# Altium PCB Refl.Sens v1.0.PcbDoc
Units mm, origin at the board's own origin, x right, y up, seen from the top; angles counter-clockwise.
Board outline 66.04 x 16.51 mm, 2 copper layers (Top Layer, Bottom Layer); 24 components, 23 nets, 103 pads, 21 vias.
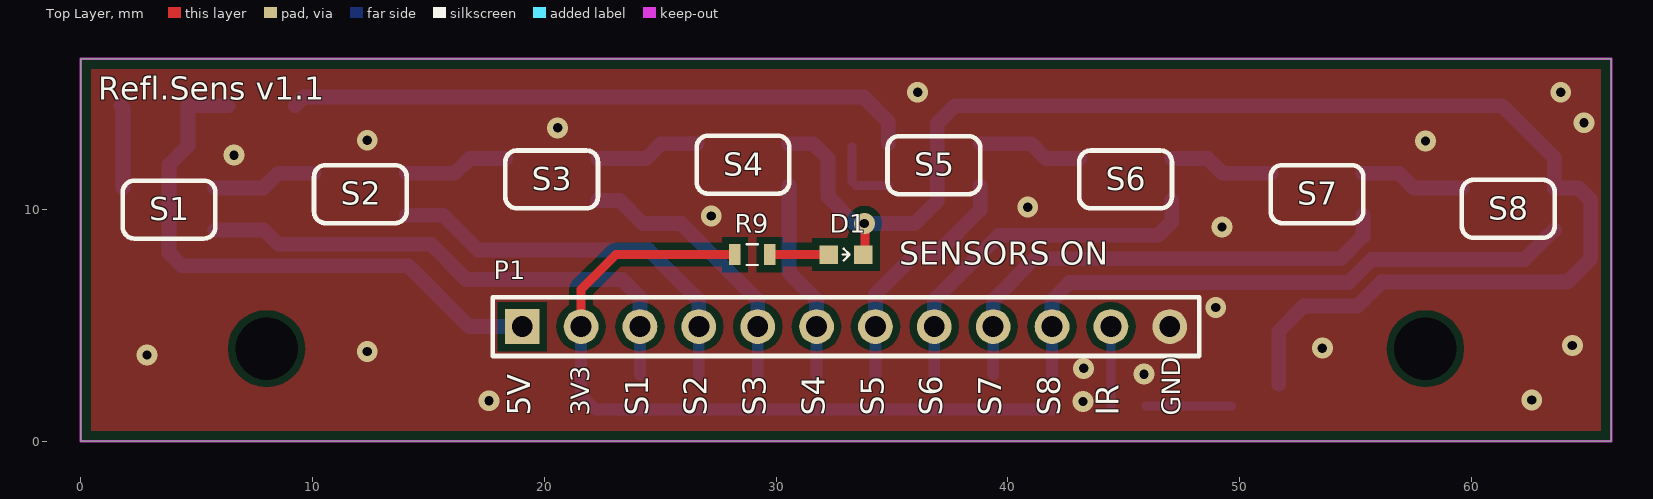
[diagram p0: Top Layer view]
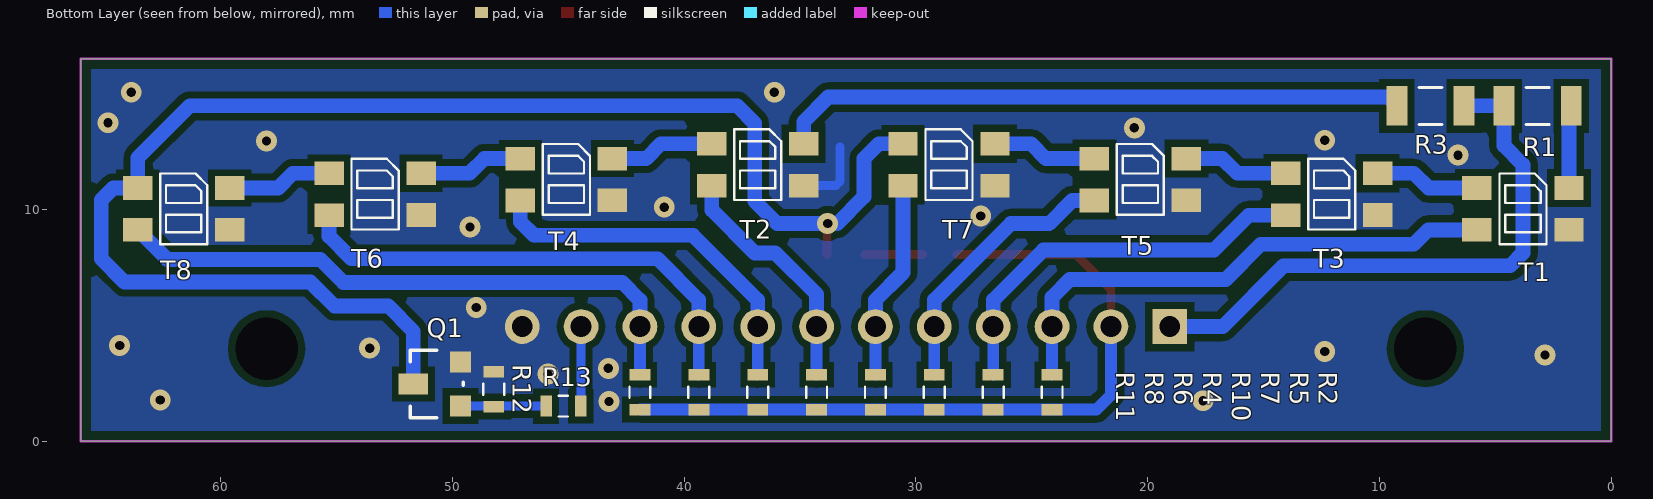
[diagram p1: Bottom Layer view, seen from below]

## Layer stack, top to bottom
Top Solder: solder mask 0.0102, Solder Resist, Dk 3.5
Top Layer: signal copper 0.0356
Dielectric 1: dielectric 0.32, FR-4, Dk 4.8
Bottom Layer: signal copper 0.0356
Bottom Solder: solder mask 0.0102, Solder Resist, Dk 3.5

## Board outline
0,0 66.04,0 66.04,16.51 0,16.51

## Design rules (kind name [scope] priority, off if disabled: settings)
Clearance STM32 [InComponent('U1')] p1: gap=0.178 ignorepadtopadclearanceinfootprint=FALSE except(0: Arc-Hole Track-Hole SMDPad-Hole THPad-Hole Via-Hole Fill-Hole Poly-Hole Region-Hole Text-Hole)
Clearance Krawedzie [OnLayer('Keep-Out Layer')] p2: gap=0.4 ignorepadtopadclearanceinfootprint=FALSE
Clearance Polygon [inPolygon] p3: gap=0.305 ignorepadtopadclearanceinfootprint=FALSE
Clearance +U_LED_TAP1 [InNet('+U_P') vs InNet('NetD101_2')   OR InNet('NetD119_2')] p4: gap=0.025 ignorepadtopadclearanceinfootprint=FALSE except(0: Arc-Hole Track-Hole SMDPad-Hole THPad-Hole Via-Hole Fill-Hole Poly-Hole Region-Hole Text-Hole)
Clearance +U_All [InNet('+U_P')] p5: gap=1.2 ignorepadtopadclearanceinfootprint=FALSE except(0: Arc-Hole Track-Hole SMDPad-Hole THPad-Hole Via-Hole Fill-Hole Poly-Hole Region-Hole Text-Hole)
Clearance All [All] p6: gap=0.178 ignorepadtopadclearanceinfootprint=FALSE except(0.152: Arc-SMDPad Track-SMDPad SMDPad-SMDPad)
ComponentClearance [All] p1: gap=0.025 collisioncheckmode=3 verticalgap=0.025 showdistances=FALSE
Height [All] p1: minheight=0 maxheight=60 prefheight=12.7
HoleSize [All] p1: absolutevalues=TRUE maxlimit=4 minlimit=0.4 maxpercent=80.000 minpercent=20.000
MinimumSolderMaskSliver [All] p1: minsoldermaskwidth=0
PolygonConnect [All] p1: connectstyle=Direct reliefconductorwidth=0.254 reliefentries=4 polygonreliefangle="90 Angle" airgapwidth=0.254
RoutingVias [All] p1: holewidth=0.711 width=1.27 viastyle="Through Hole" minholewidth=0.4 minwidth=0.8 maxholewidth=0.711 maxwidth=1.27
SilkToSilkClearance [All] p1: silktosilkclearance=0.1
SilkToSolderMaskClearance [IsPad] p1: minsilkscreentomaskgap=0.003 clearancetoexposedcopper=TRUE
SolderMaskExpansion [All] p1: expansion=0.102
Width [All] p1: maxlimit=5.08 minlimit=0.178 preferedwidth=0.254 bottomlayer_minwidth=0.203 minimp=50.000000 maximp=50.000000 favimp=50.000000
24 further rules are at their usual default settings.

## Classes and differential pairs
net class CONA[1..8]: CONA1 CONA2 CONA3 CONA4 CONA5 CONA6 CONA7 CONA8

## Components (designator, comment, footprint, x,y, rotation, side; value= is the part's Value field where it differs from the comment)
D1 "Green led" OL_0603_1608 33.02,8.06 r180 top value=OSG80603C1E
P1 "Header 12 Male" H1X12_LONG 19.05,4.953 r0 top
Q1 "BSS138LT1G" SOT23_TO236_SC59 50.673,2.476 r90 bottom
R1 "Resistor" R_1206 3.175,14.478 r0 bottom value=10R
R2 "Resistor" R_0603#1 24.13,2.121 r270 bottom value=10k
R3 "Resistor" R_1206 7.8,14.478 r180 bottom value=10R
R4 "Resistor" R_0603#1 34.29,2.121 r270 bottom value=10k
R5 "Resistor" R_0603#1 26.67,2.121 r270 bottom value=10k
R6 "Resistor" R_0603#1 36.83,2.121 r270 bottom value=10k
R7 "Resistor" R_0603#1 29.21,2.121 r270 bottom value=10k
R8 "Resistor" R_0603#1 39.37,2.121 r270 bottom value=10k
R9 "Resistor" R_0603#2 28.976,8.06 r180 top value=330R
R10 "Resistor" R_0603#1 31.75,2.121 r270 bottom value=10k
R11 "Resistor" R_0603#1 41.91,2.121 r270 bottom value=10k
R12 "Resistor" R_0603#1 48.219,2.25 r270 bottom value=100k
R13 "Resistor" R_0603#1 45.212,1.524 r180 bottom value=100R
T1 "KTIR0711S" KTIR0711S 3.81,10.033 r0 bottom
T2 "KTIR0711S" KTIR0711S 36.83,11.938 r0 bottom
T3 "KTIR0711S" KTIR0711S 12.065,10.668 r0 bottom
T4 "KTIR0711S" KTIR0711S 45.085,11.303 r0 bottom
T5 "KTIR0711S" KTIR0711S 20.32,11.303 r0 bottom
T6 "KTIR0711S" KTIR0711S 53.34,10.668 r0 bottom
T7 "KTIR0711S" KTIR0711S 28.575,11.938 r0 bottom
T8 "KTIR0711S" KTIR0711S 61.595,10.033 r0 bottom

## Footprints (in the part's own frame and the unit in brackets; to place one, negate y for a bottom-side part, rotate by r counter-clockwise, add the part's x,y. Pads: shape width x height; smd on the part's side, far side on the other; paste and mask are expansions set on the pad)
H1X12_LONG [mm]
  rect 1.5x1.5 hole 0.9: 1(0,0)
  round 1.5 hole 0.9: 2(2.54,0) 3(5.08,0) 4(7.62,0) 5(10.16,0) 6(12.7,0) 7(15.24,0) 8(17.78,0) 9(20.32,0) 10(22.86,0) 11(25.4,0) 12(27.94,0)
  silkscreen extent -1.27,-1.27 29.21,1.27, body extent -1.27,-1.27 29.21,1.22, height 26
KTIR0711S [mm]
  rect 1.27x1.016 smd: 1(-1.985,-0.9) 2(-1.985,0.9) 3(1.985,0.91) 4(1.985,-0.9)
  silkscreen extent -1.02,-1.52 1.02,1.52, body extent -2.25,-1.7 2.25,1.7, height 1.5
OL_0603_1608 [mm]
  rect 0.8x0.8 smd: 1(-0.75,0) 2(0.75,0)
  silkscreen extent -0.15,-0.25 0.15,0.25, body extent -0.8,-0.4 0.8,0.4, height 0.75
R_0603#1 [mm]
  rect 0.5x0.9 smd paste-10: 1(-0.75,0) 2(0.75,0)
  rrect40% 0.5x0.9 on Bottom Paste paste-10: 1(-0.75,0) 2(0.75,0)
  silkscreen extent -0.25,-0.45 0.25,0.45, body extent -0.8,-0.45 0.8,0.45, height 0.5
R_0603#2 [mm]
  rect 0.5x0.9 smd paste-10: 1(-0.75,0) 2(0.75,0)
  rrect40% 0.5x0.9 on Top Paste paste-10: 1(-0.75,0) 2(0.75,0)
  silkscreen extent -0.25,-0.45 0.25,0.45, body extent -0.8,-0.45 0.8,0.45, height 0.5
R_1206 [mm]
  rect 0.9x1.7 smd paste-10: 1(-1.45,0) 2(1.45,0)
  rrect40% 0.9x1.7 on Bottom Paste paste-10: 1(-1.45,0) 2(1.45,0)
  silkscreen extent -0.5,-0.8 0.5,0.8, body extent -1.6,-0.8 1.6,0.8, height 0.6
SOT23_TO236_SC59 [mil]
  rect 36x36 smd: 1(-37.5,-40) 2(37.5,-40)
  rect 36x50 smd: 3(0,40)
  silkscreen extent -57,-45 58,45, body extent -57,-55 57,55, height 51

## Part data
D1: library part OL_G_0603_OSG80603C1E, "LED GREEN", Manufacturer=Optosupply, Manufacturer Part Number=OSG80603C1E, Part Number=OL_G_0603_OSG80603C1E, SCH_Footprint=0603, Supplier 1=TME, Supplier 2="RS Components", Supplier 3=Farnell, Supplier 4=Mouser, Supplier 5=Digi-Key, Supplier Part Number 1=OSG80603C1E
P1: library part "Header 12", "Header, 12-Pin", LatestRevisionDate=17-Jul-2002, LatestRevisionNote="Re-released for DXP Platform.", System=Connector
Q1: library part QNS_BSS138LT1G_50V_0A2, Current=0A2, Manufacturer="ON Semiconductor", voltage=50V, HelpURL=https://datasheet.octopart.com/BSS138LT1G-ON-Semiconductor-datasheet-8332669.pdf, Manufacturer Part Number=BSS138LT1G, Part Number=QNS_BSS138LT1G_50V_0A2, SCH_Footprint=SOT23, Supplier 1=TME, Supplier 2="RS Components", Supplier 3=Farnell, Supplier 4=Mouser, Supplier 5=Digi-Key, Supplier Part Number 3=1752037, Supplier Part Number 4=511-STD3NK80Z, Supplier Part Number 5=497-7968-1-ND, Type=N-MOS
R1 R3: library part R_10R_1206_1, Manufacturer=Yageo, Manufacturer Part Number=RC1206FR-0710RL, Power=250mW, Tolerance=1%, voltage=200V, HelpURL=http://www.farnell.com/datasheets/444357.pdf, Part Number=R_10R_1206_1, SCH_Footprint=1206, Supplier 1=TME, Supplier 2="RS Components", Supplier 3=Farnell, Supplier 4=Mouser, Supplier 5=Digi-Key, Supplier Part Number 3=9236643, Supplier Part Number 4=603-RC1206FR-0710RL, Supplier Part Number 5=311-10.0FRCT-ND
R2 R4 R5 R6 R7 R8 R10 R11: library part R_10k_0603_1, Manufacturer=Vishay, Manufacturer Part Number=CRCW060310K0FKTABC, Power=100mW, Tolerance=1%, voltage=75V, HelpURL=http://www.tme.eu/pl/Document/622e28308c06d160637f2b14751ba16b/Data%20Sheet%20CRCW_BCe3.pdf, Part Number=R_10k_0603_1, SCH_Footprint=0603, Supplier 1=TME, Supplier 2="RS Components", Supplier 3=Farnell, Supplier 4=Mouser, Supplier 5=Digi-Key, Supplier Part Number 1=CRCW060310K0FKTABC, Supplier Part Number 4=667-ERJ-3EKF1002V, Supplier Part Number 5=P10KGCT-ND
R9: library part R_330R_0603_1, Manufacturer=Yageo, Manufacturer Part Number=RC0603FR-07330RL, Power=100mW, Supplier Part Number 1=RC0603FR-07330R, Tolerance=1%, voltage=50V, HelpURL=http://datasheet.octopart.com/RC0603FR-07330RL-Yageo-datasheet-8328172.pdf, Part Number=R_330R_0603_1, SCH_Footprint=0603, Supplier 1=TME, Supplier 2="RS Components", Supplier 3=Farnell, Supplier 4=Mouser, Supplier 5=Digi-Key, Supplier Part Number 2=5046499, Supplier Part Number 3=9238425, Supplier Part Number 4=603-RC0603FR-07330RL, Supplier Part Number 5=311-330HRCT-ND
R12: library part R_100k_0603_1, Manufacturer=Royalohm, Manufacturer Part Number=0603SAF1003T5E, Power=100mW, Supplier Part Number 1=SMD0603-100K-1%, Tolerance=1%, voltage=50V, HelpURL=http://www.tme.eu/pl/Document/b315665a56acbc42df513c99b390ad98/ROYALOHM-THICKFILM.pdf, Part Number=R_100k_0603_1, SCH_Footprint=0603, Supplier 1=TME, Supplier 2="RS Components", Supplier 3=Farnell, Supplier 4=Mouser, Supplier 5=Digi-Key, Supplier Part Number 4=667-ERJ-3EKF1003V, Supplier Part Number 5=P100KHCT-ND
R13: library part R_100R_0603_1, Manufacturer=Yageo, Manufacturer Part Number=RC0603FR-07100RL, Power=100mW, Supplier Part Number 1=RC0603FR-07100R, Tolerance=1%, voltage=50V, HelpURL=http://www.tme.eu/en/Document/d2a72e545e5c8eb7bf2a04fa97535928/rc0603yageo.pdf, Part Number=R_100R_0603_1, SCH_Footprint=0603, Supplier 1=TME, Supplier 2="RS Components", Supplier 3=Farnell, Supplier 4=Mouser, Supplier 5=Digi-Key, Supplier Part Number 3=2131804, Supplier Part Number 4=603-RC0603FR-07100RL, Supplier Part Number 5=311-100HRCT-ND

## Free pads (board coordinates)
  round 0 hole 2.7 unplated: 2(8.019,4) 2(58.021,4)

## Via types
v1: diameter 0.9, hole 0.4, Top Layer to Bottom Layer, tented both sides, 21 vias

## Nets (pads, with @x,y where several pads share a name; then routed paths per layer and width w, separated by ;. In a path a pad name is that pad's centre, name@x,y a point inside that pad or via, vN(x,y) a via of type N, cw(c..) or ccw(c..) an arc to the next point about the centre after c; other vN are vias at no path point)
+3V3: P1.2 R2.2@24.13,1.371 R4.2@34.29,1.371 R5.2@26.67,1.371 R6.2@36.83,1.371 R7.2@29.21,1.371 R8.2@39.37,1.371 R9.2@28.226,8.06 R10.2@31.75,1.371 R11.2@41.91,1.371 | length 32.4
  Top Layer w0.381: P1.2 21.59,6.563 23.087,8.06 R9.2@28.226,8.06
  Bottom Layer w0.508: P1.2 21.59,1.994 22.213,1.371 24.13,1.371 26.67,1.371 29.21,1.371 31.75,1.371 34.29,1.371 36.83,1.371 39.37,1.371 R11.2@41.91,1.371
+5V: P1.1 R1.2@4.625,14.478 R3.2@6.35,14.478 | length 25
  Bottom Layer w0.635: R3.2@6.35,14.478 4.625,14.478 4.625,12.753 3.81,11.938 3.81,8.128 4.363,7.575 14.142,7.575 16.764,4.953 P1.1
GND: P1.12 Q1.2 R12.1@48.219,3 T1.2 T2.2 T3.2 T4.2 T5.2 T6.2 T7.2 T8.2 | length 3.1
  Bottom Layer w0.381: 33.274,12.7 33.274,11.221 33.457,11.038 T2.2
  other v1: 43.25,1.725 17.612,1.75 62.612,1.785 45.875,2.9 43.275,3.15 2.862,3.73 12.362,3.879 53.575,4.021 64.362,4.133 48.975,5.775 49.245,9.25 27.208,9.727 40.862,10.105 6.612,12.35 58.021,12.965 12.362,12.994 20.577,13.527 64.862,13.75 36.112,15.061 63.862,15.061
NetD1_1: D1.1 Q1.3 T7.4 T8.4 | length 64
  Top Layer w0.381: v1(33.812,9.4) 33.833,9.379 D1.1@33.833,8.06
  Bottom Layer w0.635: T7.4 31.612,12.838 32.247,12.203 32.247,10.552 v1@33.401,9.398 ; v1@33.812,9.398 35.988,9.398 36.957,10.367 36.957,13.716 37.719,14.478 61.341,14.478 63.58,12.239 T8.4 64.632,10.933 65.151,10.414 65.151,7.874 64.152,6.875 56.125,6.875 55.092,5.842 52.775,5.842 51.689,4.756 Q1.3
NetD1_2: D1.2 R9.1@29.726,8.06 | length 2.5
  Top Layer w0.381: R9.1@29.726,8.06 D1.2@32.207,8.06
NetP1_11: P1.11 R13.2@44.462,1.524 | length 3.4
  Bottom Layer w0.381: P1.11 44.45,1.536 R13.2@44.462,1.524
NetQ1_1: Q1.1 R12.2@48.219,1.5 R13.1@45.962,1.524 | length 3.7
  Bottom Layer w0.381: R13.1@45.962,1.524 Q1.1
NetR1_1: R1.1@1.725,14.478 T1.1 | length 3.6
  Bottom Layer w0.635: R1.1@1.725,14.478 1.825,14.378 T1.1
NetR3_1: R3.1@9.25,14.478 T2.1 | length 27.2
  Bottom Layer w0.635: R3.1@9.25,14.478 9.631,14.859 33.782,14.859 34.845,13.796 T2.1
NetT1_4: T1.4 T3.1 | length 4.5
  Bottom Layer w0.635: T1.4 7.885,10.933 8.52,11.568 T3.1
NetT2_4: T2.4 T4.1 | length 4.5
  Bottom Layer w0.635: T2.4 41.01,12.838 41.645,12.203 T4.1
NetT3_4: T3.4 T5.1 | length 4.5
  Bottom Layer w0.635: T3.4 16.14,11.568 16.775,12.203 T5.1
NetT4_4: T4.4 T6.1 | length 4.5
  Bottom Layer w0.635: T4.4 48.63,12.203 49.265,11.568 T6.1
NetT5_4: T5.4 T7.1 | length 4.5
  Bottom Layer w0.635: T5.4 24.395,12.203 25.03,12.838 T7.1
NetT6_4: T6.4 T8.1 | length 4.5
  Bottom Layer w0.635: T6.4 56.885,11.568 57.52,10.933 T8.1
SENS1: P1.3 R2.1@24.13,2.871 T1.3 | length 22.9
  Bottom Layer w0.508: R2.1@24.13,2.871 P1.3
  Bottom Layer w0.635: T1.3 7.895,9.123 8.518,8.5 15.122,8.5 16.637,6.985 23.368,6.985 24.13,6.223 P1.3
SENS2: P1.4 R5.1@26.67,2.871 T3.3 | length 17.4
  Bottom Layer w0.508: R5.1@26.67,2.871 P1.4
  Bottom Layer w0.635: T3.3 15.642,9.758 17.145,8.255 24.511,8.255 26.67,6.096 P1.4
SENS3: P1.5 R7.1@29.21,2.871 T5.3 | length 11.9
  Bottom Layer w0.508: R7.1@29.21,2.871 P1.5
  Bottom Layer w0.635: T5.3 23.262,10.393 24.257,9.398 25.908,9.398 29.21,6.096 P1.5
SENS4: P1.6 R10.1@31.75,2.871 T7.3 | length 8.6
  Bottom Layer w0.508: R10.1@31.75,2.871 P1.6
  Bottom Layer w0.635: T7.3 30.56,7.286 31.75,6.096 P1.6
SENS5: P1.7 R4.1@34.29,2.871 T2.3 | length 10.6
  Bottom Layer w0.508: R4.1@34.29,2.871 P1.7
  Bottom Layer w0.635: P1.7 34.29,6.35 36.068,8.128 36.957,8.128 38.815,9.986 T2.3
SENS6: P1.8 R6.1@36.83,2.871 T4.3 | length 15.8
  Bottom Layer w0.508: R6.1@36.83,2.871 P1.8
  Bottom Layer w0.635: P1.8 36.83,6.096 39.624,8.89 46.482,8.89 47.07,9.478 T4.3
SENS7: P1.9 R8.1@39.37,2.871 T6.3 | length 21.2
  Bottom Layer w0.508: R8.1@39.37,2.871 P1.9
  Bottom Layer w0.635: P1.9 39.37,6.096 41.148,7.874 54.356,7.874 55.325,8.843 T6.3
SENS8: P1.10 R11.1@41.91,2.871 T8.3 | length 26.1
  Bottom Layer w0.508: R11.1@41.91,2.871 P1.10
  Bottom Layer w0.635: P1.10 41.91,6.096 42.672,6.858 54.714,6.858 55.706,7.85 62.307,7.85 T8.3
pads on no net: R1.1@1.725,14.478 R1.2@4.625,14.478 R2.1@24.13,2.871 R2.2@24.13,1.371 R3.1@9.25,14.478 R3.2@6.35,14.478 R4.1@34.29,2.871 R4.2@34.29,1.371 R5.1@26.67,2.871 R5.2@26.67,1.371 R6.1@36.83,2.871 R6.2@36.83,1.371 R7.1@29.21,2.871 R7.2@29.21,1.371 R8.1@39.37,2.871 R8.2@39.37,1.371 R9.1@29.726,8.06 R9.2@28.226,8.06 R10.1@31.75,2.871 R10.2@31.75,1.371 R11.1@41.91,2.871 R11.2@41.91,1.371 R12.1@48.219,3 R12.2@48.219,1.5 R13.1@45.962,1.524 R13.2@44.462,1.524

## Polygon pours and split planes (outlines as drawn)
GND on Top Layer "Bottom Layer-No Net" (solid, remove dead copper, pour order 4): 66.04,0 0,0 0,16.51 66.04,16.51
GND on Bottom Layer "Bottom Layer-No Net" (solid, remove dead copper, pour order 2): 66.04,0 0,0 0,16.51 66.04,16.51

## Keep-outs
Keep-Out Layer:
  the board outline again, w0.1

## Silkscreen, mask and mechanical layers (free items; w line width, h text height)
Top Overlay:
  lines w0.127: 3.812,11.25 ccw(c3.812,11.25) 3.812,11.25 ; 12.065,11.918 ccw(c12.065,11.918) 12.065,11.918 ; 20.32,12.553 ccw(c20.32,12.553) 20.32,12.553 ; 28.575,13.188 ccw(c28.575,13.188) 28.575,13.188 ; 36.812,13.168 ccw(c36.812,13.168) 36.812,13.168 ; 45.085,12.553 ccw(c45.085,12.553) 45.085,12.553 ; 53.34,11.918 ccw(c53.34,11.918) 53.34,11.918 ; 61.595,11.283 ccw(c61.595,11.283) 61.595,11.283
  lines w0.2: 1.812,9.25 ccw(c2.312,9.25) 2.312,8.75 5.312,8.75 ccw(c5.312,9.25) 5.812,9.25 5.812,10.75 ccw(c5.312,10.75) 5.312,11.25 2.312,11.25 ccw(c2.312,10.75) 1.812,10.75 1.812,9.25 ; 10.065,9.918 ccw(c10.565,9.918) 10.565,9.418 13.565,9.418 ccw(c13.565,9.918) 14.065,9.918 14.065,11.418 ccw(c13.565,11.418) 13.565,11.918 10.565,11.918 ccw(c10.565,11.418) 10.065,11.418 10.065,9.918 ; 18.32,10.553 ccw(c18.82,10.553) 18.82,10.053 21.82,10.053 ccw(c21.82,10.553) 22.32,10.553 22.32,12.053 ccw(c21.82,12.053) 21.82,12.553 18.82,12.553 ccw(c18.82,12.053) 18.32,12.053 18.32,10.553 ; 26.575,11.188 ccw(c27.075,11.188) 27.075,10.688 30.075,10.688 ccw(c30.075,11.188) 30.575,11.188 30.575,12.688 ccw(c30.075,12.688) 30.075,13.188 27.075,13.188 ccw(c27.075,12.688) 26.575,12.688 26.575,11.188 ; 34.812,11.168 ccw(c35.312,11.168) 35.312,10.668 38.312,10.668 ccw(c38.312,11.168) 38.812,11.168 38.812,12.668 ccw(c38.312,12.668) 38.312,13.168 35.312,13.168 ccw(c35.312,12.668) 34.812,12.668 34.812,11.168 ; 43.085,10.553 ccw(c43.585,10.553) 43.585,10.053 46.585,10.053 ccw(c46.585,10.553) 47.085,10.553 47.085,12.053 ccw(c46.585,12.053) 46.585,12.553 43.585,12.553 ccw(c43.585,12.053) 43.085,12.053 43.085,10.553 ; 51.34,9.918 ccw(c51.84,9.918) 51.84,9.418 54.84,9.418 ccw(c54.84,9.918) 55.34,9.918 55.34,11.418 ccw(c54.84,11.418) 54.84,11.918 51.84,11.918 ccw(c51.84,11.418) 51.34,11.418 51.34,9.918 ; 59.595,9.283 ccw(c60.095,9.283) 60.095,8.783 63.095,8.783 ccw(c63.095,9.283) 63.595,9.283 63.595,10.783 ccw(c63.095,10.783) 63.095,11.283 60.095,11.283 ccw(c60.095,10.783) 59.595,10.783 59.595,9.283
  text "Refl.Sens v1.1" at 0.75,14.75 h1
  text "S4" at 27.722,11.47 h1
  text "S5" at 35.959,11.45 h1
  text "S3" at 19.467,10.835 h1
  text "S6" at 44.232,10.835 h1
  text "S2" at 11.212,10.2 h1
  text "S7" at 52.487,10.2 h1
  text "S8" at 60.742,9.565 h1
  text "S1" at 2.959,9.532 h1
  text "SENSORS ON" at 35.312,7.61 h1
  text "5V" at 19.399,1.101 h1 r90
  text "3V3" at 21.939,1.101 h0.8 r90
  text "S1" at 24.479,1.101 h1 r90
  text "S2" at 27.019,1.101 h1 r90
  text "S3" at 29.559,1.101 h1 r90
  text "S4" at 32.099,1.101 h1 r90
  text "S5" at 34.639,1.101 h1 r90
  text "S6" at 37.179,1.101 h1 r90
  text "S7" at 39.719,1.101 h1 r90
  text "S8" at 42.259,1.101 h1 r90
  text "IR" at 44.799,1.101 h1 r90
  text "GND" at 47.449,1.101 h0.8 r90
Mechanical 1:
  the board outline again, w0.1
Mechanical 5:
  circle w0.254: c58.021,4 r3
  circle w0.254: c8.019,4 r3

## Text inside footprints (layer, text, board x,y; h text height)
D1: Mechanical 17 "d" at 33.909,8.187 h0.25 r180; Mechanical 19 "-" at 33.909,8.187 h0.25 r180
Q1: Mechanical 17 "d" at 50.546,1.206 h0.51 r270; Mechanical 19 "-" at 50.546,1.206 h0.51 r270